# Altium PCB F411CEU6.PcbDoc
Units mm, origin at the board's own origin, x right, y up, seen from the top; angles counter-clockwise.
Board outline 53.5 x 69.5 mm, 2 copper layers (Top Layer, Bottom Layer); 7 components, 10 nets, 58 pads, 0 vias.
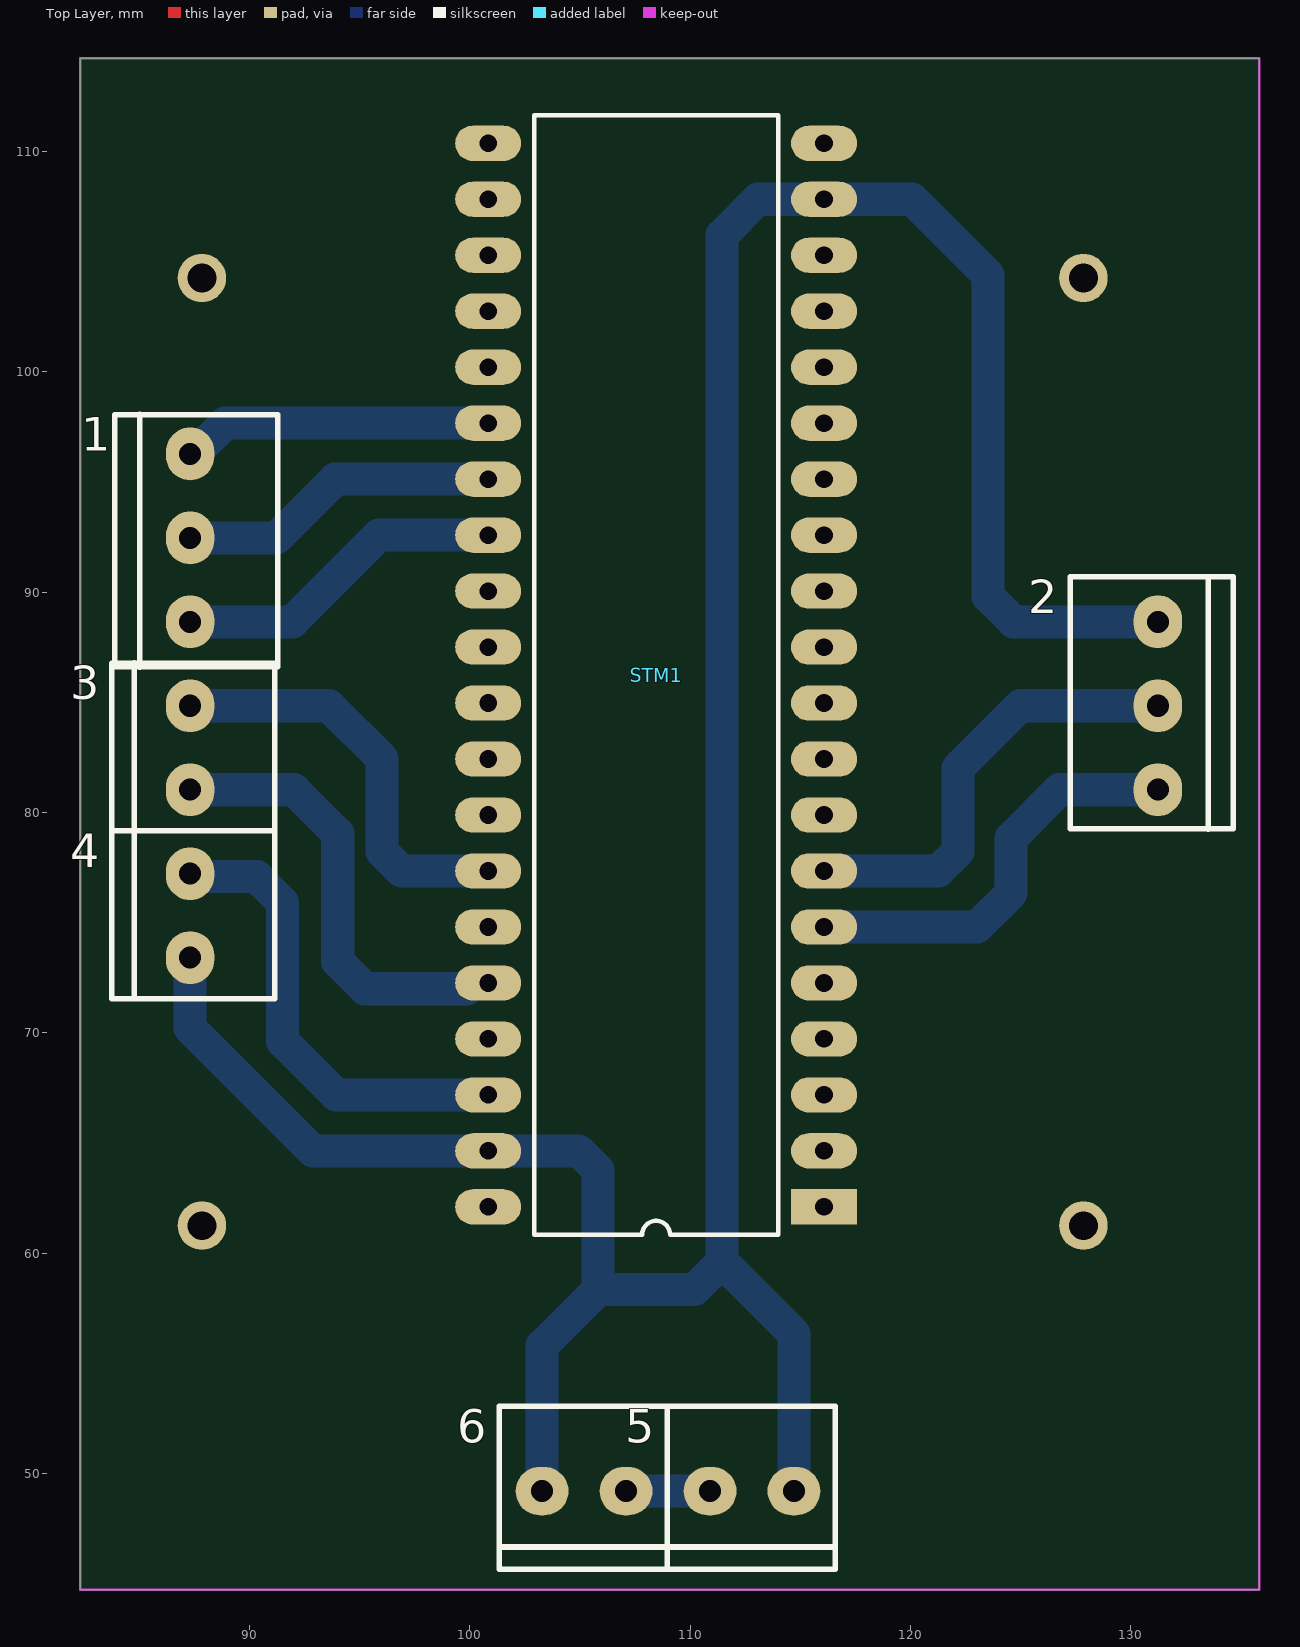
[diagram p0: Top Layer view]
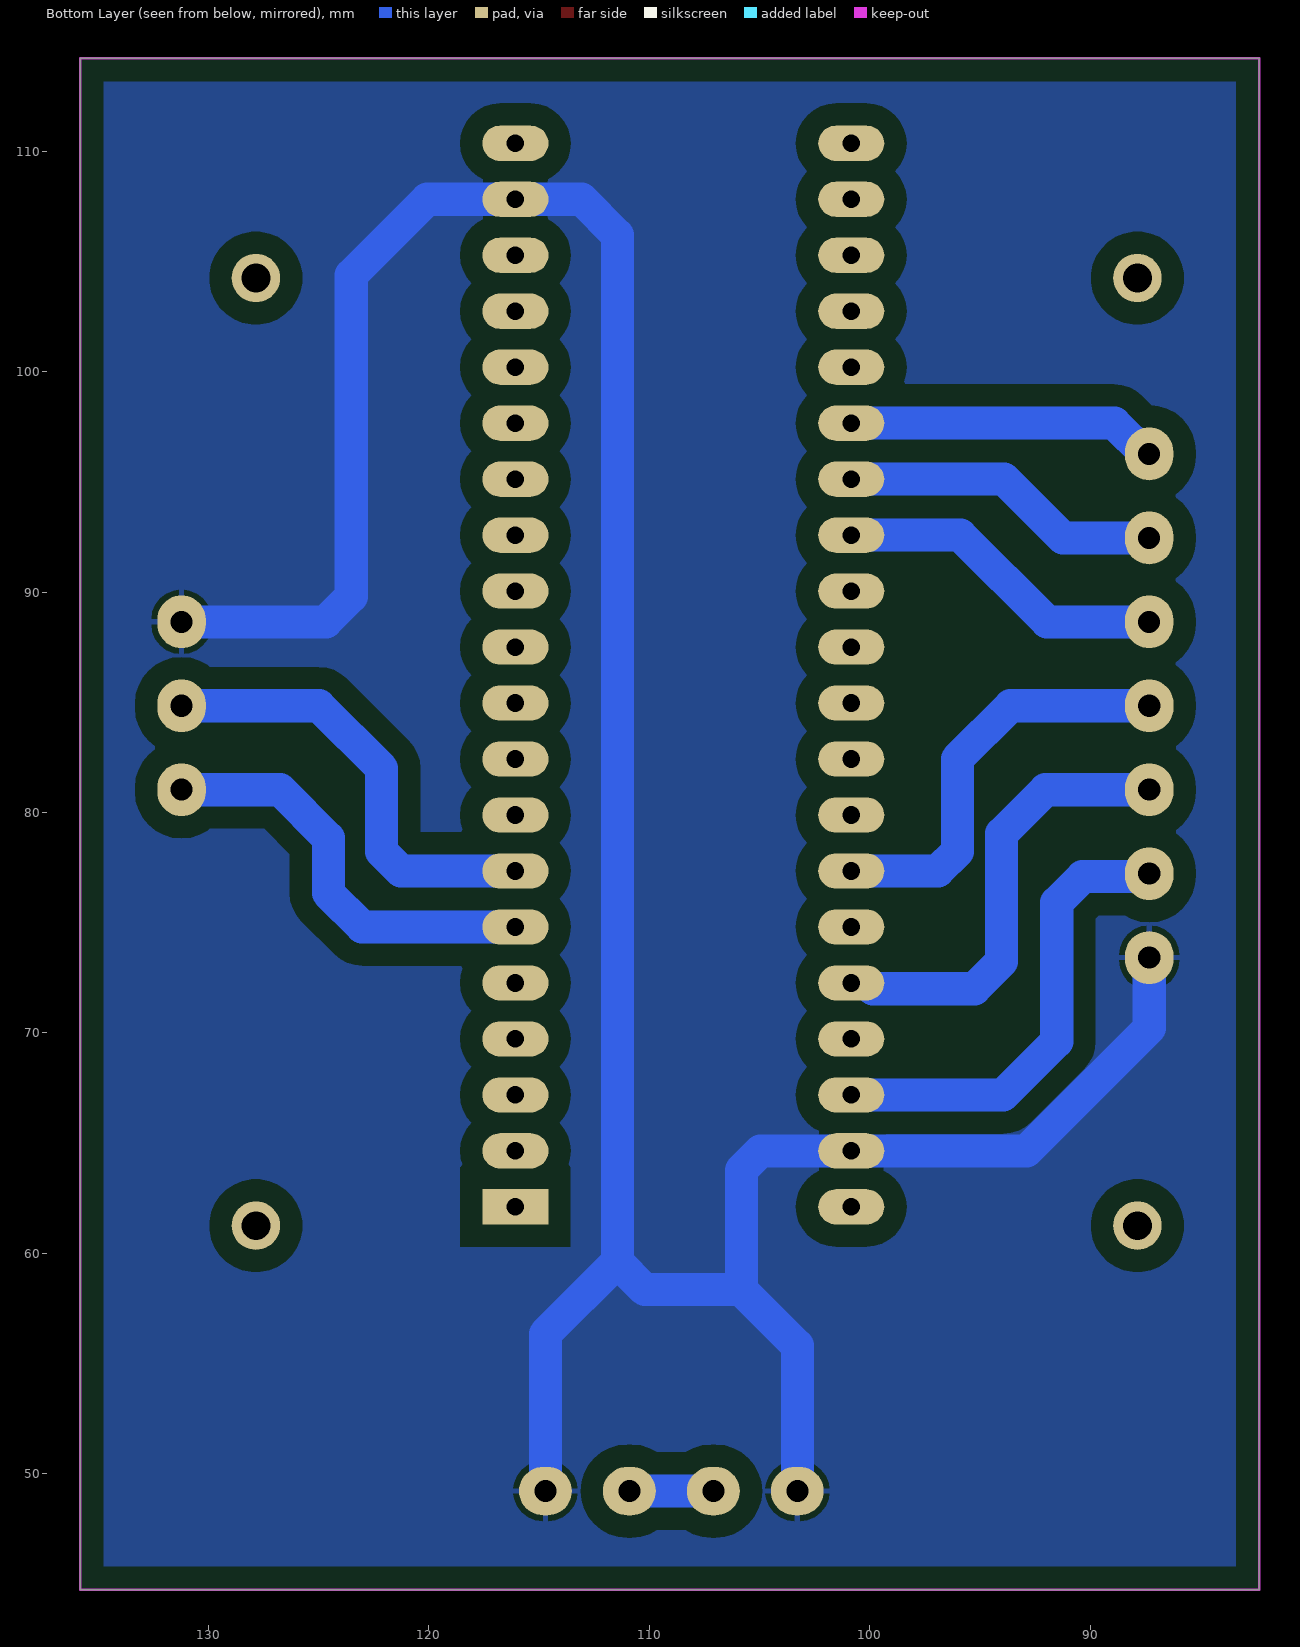
[diagram p1: Bottom Layer view, seen from below]
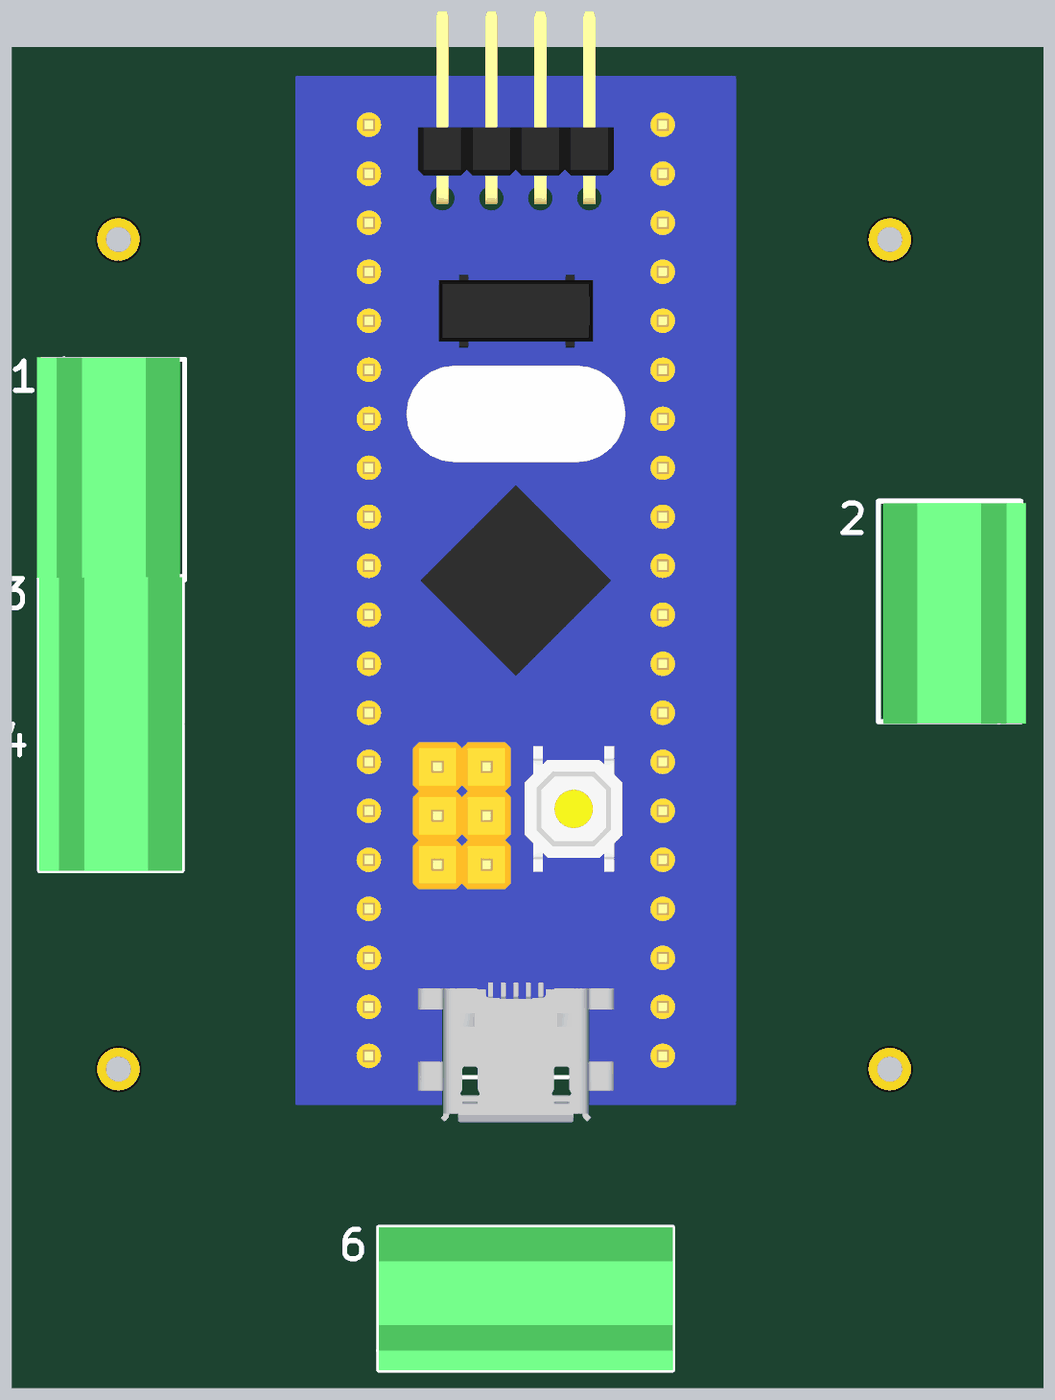
[diagram p2: 3D render of the assembled board from above, using the file's embedded part models]

## Layer stack, top to bottom
Top Solder: solder mask 0.0102, Solder Resist, Dk 3.5
Top Layer: signal copper 0.0356
Dielectric 1: dielectric 0.32, FR-4, Dk 4.8
Bottom Layer: signal copper 0.0356
Bottom Solder: solder mask 0.0102, Solder Resist, Dk 3.5

## Board outline
82.325,44.725 82.325,114.225 135.825,114.225 135.825,44.725

## Design rules (kind name [scope] priority, off if disabled: settings)
Clearance [All] p1: gap=0.254 ignorepadtopadclearanceinfootprint=FALSE except(1: Arc-Fill Arc-Poly Arc-Region Track-Fill Track-Poly Track-Region THPad-Fill THPad-Poly THPad-Region Fill-Hole Poly-Hole Region-Hole)
PolygonConnect [All] p1: connectstyle=Relief reliefconductorwidth=0.254 reliefentries=4 polygonreliefangle="90 Angle" airgapwidth=0.254
RoutingVias [All] p1: holewidth=0.711 width=1.27 viastyle="Through Hole" minholewidth=0.711 minwidth=1.27 maxholewidth=0.711 maxwidth=1.27
SolderMaskExpansion [All] p1: expansion=0.102 istentingtop=FALSE
Width GND_1 [InNet('ENCODER_GND')] p1: maxlimit=1.5 minlimit=0.254 preferedwidth=0.8
Width GND_2 [InNet('UART_GND')] p2: maxlimit=1.5 minlimit=0.254 preferedwidth=0.8
Width NET [All] p3: maxlimit=1.5 minlimit=0.254 preferedwidth=0.8
30 further rules are at their usual default settings.

## Components (designator, comment, footprint, x,y, rotation, side; value= is the part's Value field where it differs from the comment)
1 "KF128_3P" KF128_3P 87.19,96.27 r270 top
2 "KF128_3P" KF128_3P 131.352,81.03 r90 top
3 "KF128_2P" KF128_2P 87.188,84.73 r270 top
4 "KF128_2P" KF128_2P 87.188,77.11 r270 top
5 "KF128_2P" KF128_2P 111.015,49.081 r0 top
6 "KF128_2P" KF128_2P 103.395,49.081 r0 top
STM1 "KIT STM32F103C8T6" "STM32F103 KIT" 116.078,62.103 r180 top

## Footprints (in the part's own frame and the unit in brackets; to place one, negate y for a bottom-side part, rotate by r counter-clockwise, add the part's x,y. Pads: shape width x height; smd on the part's side, far side on the other; paste and mask are expansions set on the pad)
KF128_2P [mm]
  oval 2.4x2.2 hole 1: 1(-0.11,0.127) 2(3.7,0.127)
  silkscreen extent -2.06,-3.43 5.57,3.97, body extent -2.03,-3.43 5.59,3.97, height 9.9
KF128_3P [mm]
  oval 2.4x2.2 hole 1: 1(0,0.127) 2(3.81,0.127) 3(7.62,0.127)
  silkscreen extent -1.8,-3.3 9.67,4.1, body extent -1.88,-3.56 9.55,3.84, height 9.9
"STM32F103 KIT" [mm]
  rect 3x1.6 hole 0.8: 1(0,0)
  oval 3x1.6 hole 0.8: 2(0,-2.54) 3(0,-5.08) 4(0,-7.62) 5(0,-10.16) 6(0,-12.7) 7(0,-15.24) 8(0,-17.78) 9(0,-20.32) 10(0,-22.86) 11(0,-25.4) 12(0,-27.94) 13(0,-30.48) 14(0,-33.02) 15(0,-35.56) 16(0,-38.1) 17(0,-40.64) 18(0,-43.18) 19(0,-45.72) 20(0,-48.26) 21(15.24,-48.26) 22(15.24,-45.72) 23(15.24,-43.18) 24(15.24,-40.64) 25(15.24,-38.1) 26(15.24,-35.56) 27(15.24,-33.02) 28(15.24,-30.48) 29(15.24,-27.94) 30(15.24,-25.4) 31(15.24,-22.86) 32(15.24,-20.32) 33(15.24,-17.78) 34(15.24,-15.24) 35(15.24,-12.7) 36(15.24,-10.16) 37(15.24,-7.62) 38(15.24,-5.08) 39(15.24,-2.54) 40(15.24,0)
  silkscreen extent 2.08,-49.53 13.16,1.27, body extent -3.81,-53.97 19.05,3.59, height 16.12

## Part data
1 2: "KF128 - pin spacing 3.81mm - 3P", Ma hang="Domino KF128-3.81 3Pin"
3 4 5 6: "KF128 - pin spacing 3.81mm - 2P", Ma hang="Domino KF128-3.81 2Pin"
STM1: library part "STM32f103 Bluepill", "KIT STM32F103C8T6 Bluepill"

## Free pads (board coordinates)
  round 2.2 hole 1.3: 112(87.85,61.25) 114(127.85,61.25) 116(127.85,104.25) 118(87.85,104.25)

## Nets (pads, with @x,y where several pads share a name; then routed paths per layer and width w, separated by ;. In a path a pad name is that pad's centre, name@x,y a point inside that pad or via, vN(x,y) a via of type N, cw(c..) or ccw(c..) an arc to the next point about the centre after c; other vN are vias at no path point)
ENCODER_A: 3.1 STM1.34 | length 19.1
  Bottom Layer w1.5: 3.1 93.61,84.84 96.025,82.425 96.025,78.222 96.904,77.343 STM1.34
ENCODER_B: 3.2 STM1.36 | length 20.8
  Bottom Layer w1.5: 3.2 92.02,81.03 94.013,79.038 94.013,73.237 95.25,72 99.848,72 100.111,72.263 STM1.36
ENCODER_VCC: 4.1 STM1.38 | length 21.4
  Bottom Layer w1.5: 4.1 87.449,77.086 90.339,77.086 91.513,75.912 91.513,69.612 93.942,67.183 STM1.38
GND: 2.3 4.2 5.2 6.1 STM1.19 STM1.39 | length 141.4
  Bottom Layer w1.5: 4.2 87.315,70.21 92.882,64.643 STM1.39 104.946,64.643 105.825,63.764 105.825,58.35 ; 6.1 103.285,55.81 105.825,58.35 ; 5.2 114.715,56.335 111.45,59.6 ; 2.3 124.679,88.65 123.525,89.804 123.525,104.375 120.077,107.823 STM1.19 113.073,107.823 111.45,106.2 111.45,59.6 ; 105.825,58.35 110.2,58.35 111.45,59.6
MOTOR_P1: 1.1 STM1.26 | length 14.1
  Bottom Layer w1.5: 1.1 87.506,96.27 88.899,97.663 STM1.26
MOTOR_P2: 1.2 STM1.27 | length 14.6
  Bottom Layer w1.5: 1.2 91.235,92.46 93.898,95.123 STM1.27
MOTOR_PWM: 1.3 STM1.28 | length 15.2
  Bottom Layer w1.5: 1.3 91.95,88.65 95.883,92.583 STM1.28
UART_RX: 2.2 STM1.7 | length 20.5
  Bottom Layer w1.5: STM1.7 121.271,77.343 122.15,78.222 122.15,82 124.99,84.84 2.2
UART_TX: 2.1 STM1.6 | length 19.2
  Bottom Layer w1.5: STM1.6 123.028,74.803 124.562,76.337 124.562,78.837 126.755,81.03 2.1
VIN: 5.1 6.2 | length 3.8
  Bottom Layer w1.5: 6.2 5.1
pads on no net: STM1.1 STM1.2 STM1.3 STM1.4 STM1.5 STM1.8 STM1.9 STM1.10 STM1.11 STM1.12 STM1.13 STM1.14 STM1.15 STM1.16 STM1.17 STM1.18 STM1.20 STM1.21 STM1.22 STM1.23 STM1.24 STM1.25 STM1.29 STM1.30 STM1.31 STM1.32 STM1.33 STM1.35 STM1.37 STM1.40

## Polygon pours and split planes (outlines as drawn)
GND on Bottom Layer "NONET_L-01_P-001" (solid, remove dead copper, pour order 0): 82.625,114.2 82.7,114.275 135.725,114.275 135.725,45.15 135.95,44.925 135.725,44.7 82.325,44.7

## Keep-outs
Keep-Out Layer:
  the board outline again, w0.1